# Allegro board B07_0918.brd
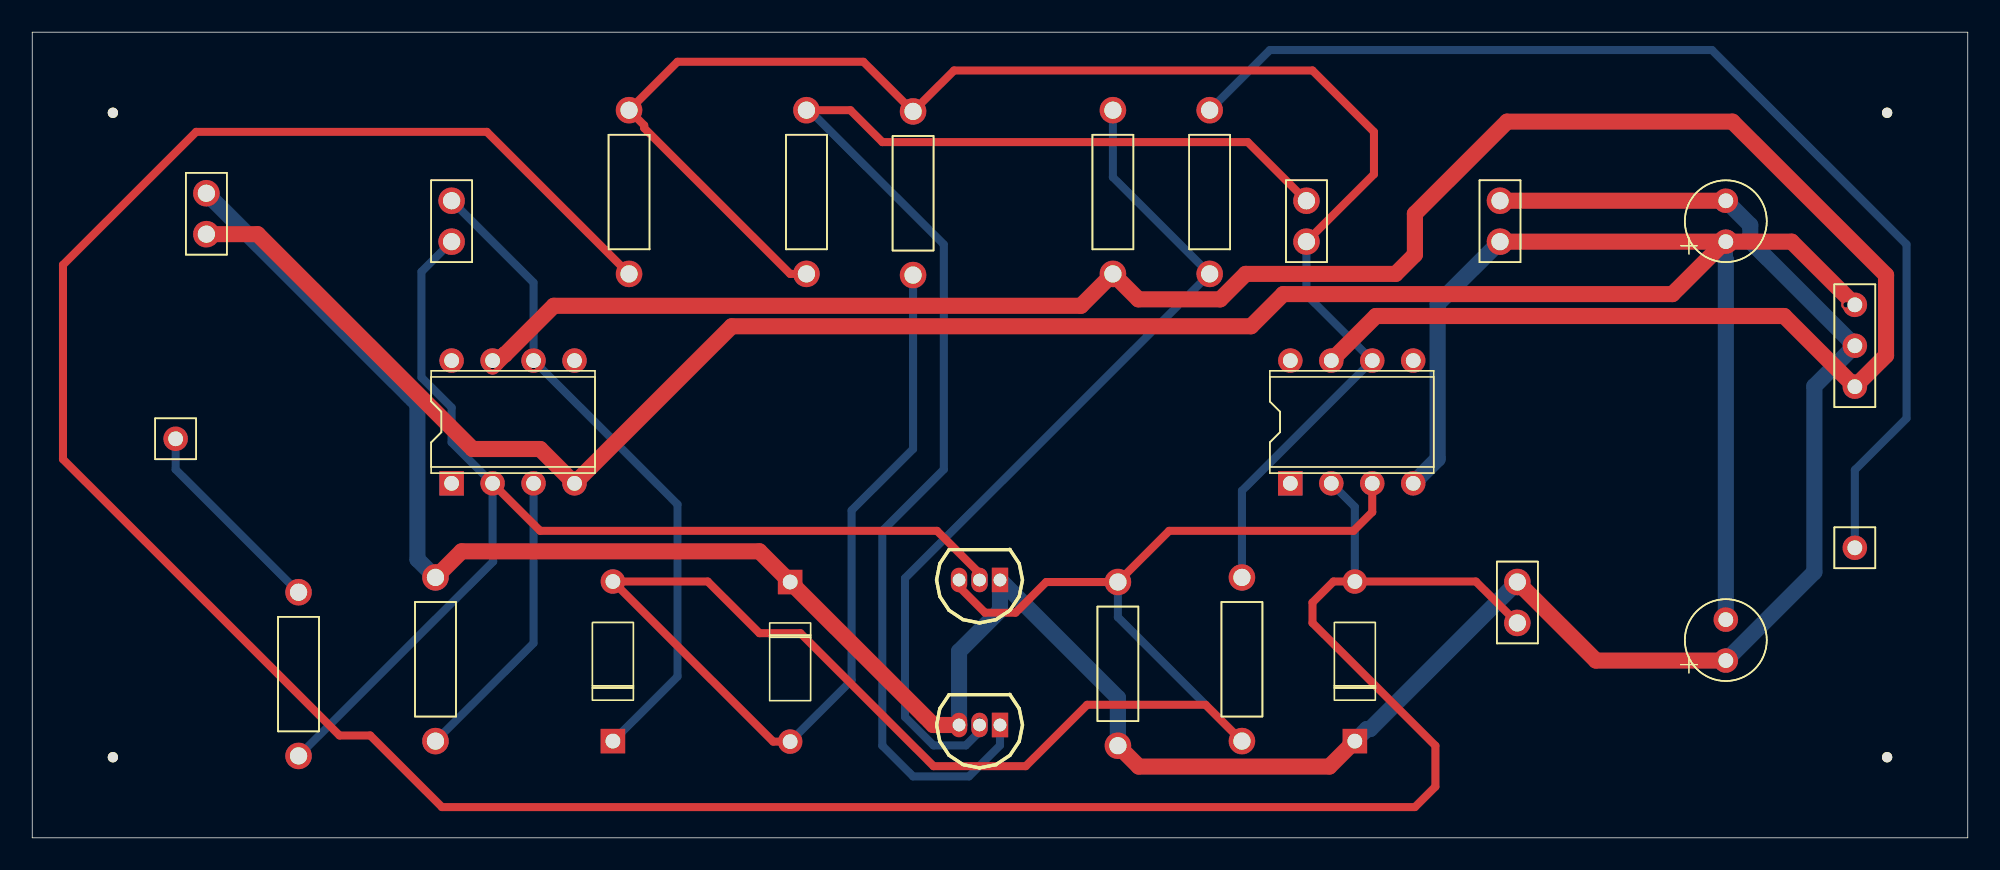
[diagram p0: board, top side]
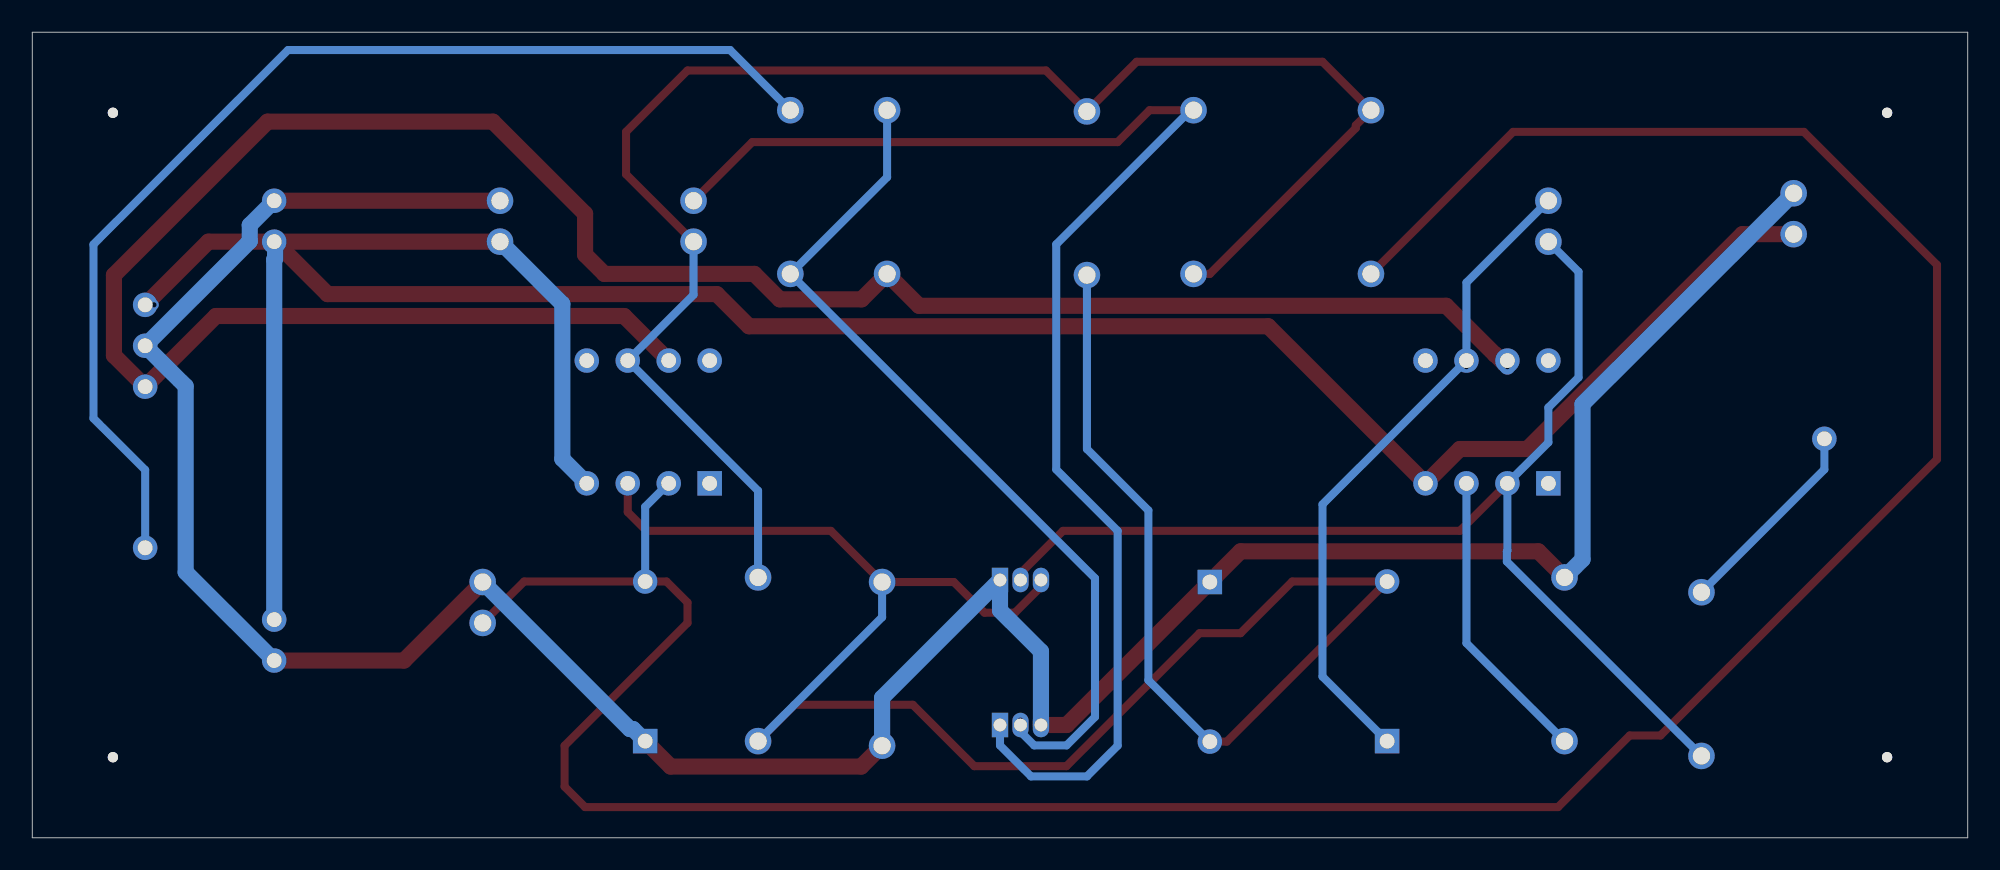
[diagram p1: board, bottom side, seen from below]

Outline 120 x 50 mm; copper layers: TOP, BOTTOM. Coordinates in mm from the lower left corner of the outline.
Outline path: 0,50 0,0 120,0 120,50 0,50

## Design rules (mm)
constraint set DEFAULT: min track width 0.5
nets with their own width: min track width 1; nets +12V -12V GND

## Placement (name value [footprint] x y rotation side)
C1  CAP NP  [CAPCK05]  10.79 37.47 0 top
C2  CAP NP  [CAPCK05]  26 37 0 top
C3  CAP NP  [CAPCK05]  91 37 0 top
C4  CAP NP  [CAPCK05]  92.08 13.34 0 top
C5  CAP NP  [CAPCK05]  79 37 0 top
C6  CAP POL  [CAP196]  105 11 0 top
C7  CAP POL  [CAP196]  105 37 0 top
D1  DIODE  [DO41]  82 6 0 top
D2  DIODE  [DO41]  36 6 0 top
D3  DIODE  [DO41]  46.99 15.88 180 top
J1  V1  [JUMPER1]  8.89 24.77 0 top
J2  CON3  [JUMPER3]  113 28 90 top
J3  CON1  [JUMPER1]  113 18 0 top
NOREF  -  []  0 31.78 0 top
NOREF#2  -  []  13.62 0 90 top
NOREF#3  -  [unnamed#2]  5 5 0 top
NOREF#4  -  [unnamed#2]  115 45 0 top
NOREF#5  -  [unnamed#2]  5 45 0 top
NOREF#6  -  [unnamed#2]  115 5 0 top
Q1  NPN BCE  [TO92]  60 16 180 top
Q2  NPN BCE  [TO92]  60 7 180 top
R1  RESISTOR  [RES400]  16.51 5.08 0 top
R2  RESISTOR  [RES400]  25 6 0 top
R3  RESISTOR  [RES400]  67.31 15.88 180 top
R4  RESISTOR  [RES400]  75 6 0 top
R5  RESISTOR  [RES400]  54.61 34.92 0 top
R6  RESISTOR  [RES400]  67 35 0 top
R7  RESISTOR  [RES400]  73 35 0 top
R8  RESISTOR  [RES400]  48 35 0 top
R9  RESISTOR  [RES400]  37 35 0 top
U1  LM741  [DIP8_3]  26 22 90 top
U2  LM741  [DIP8_3]  78 22 90 top

## Library data of the parts
C1-C5 = CAP NP: Tolerance: ***; User Part Number: ***
C6 C7 = CAP POL: Tolerance: ***; User Part Number: ***
D1-D3 = DIODE
J1 J3 = CON1: User Part Number: ***
J2 = CON3: User Part Number: ***
Q1 Q2 = NPN BCE
R1-R9 = R: Tolerance: ***; User Part Number: ***
U1 U2 = LM741_0: Tolerance: ***; User Part Number: ***

## Footprints (pads in the part's own frame, mm; a bottom-side part is the same pattern mirrored in y, then rotated)
CAP196
  round 1.524 hole 0.914: 1(0,0) 2(0,2.54)
CAPCK05
  round 1.651 hole 1.067: 1(0,0) 2(0,2.54)
DIP8_3
  rect 1.524x1.524 hole 0.914: 1(0,0)
  round 1.524 hole 0.914: 2(0,-2.54) 3(0,-5.08) 4(0,-7.62) 5(7.62,-7.62) 6(7.62,-5.08) 7(7.62,-2.54) 8(7.62,0)
DO41
  rect 1.524x1.524 hole 0.914: 1(0,0)
  round 1.524 hole 0.914: 2(0,9.906)
JUMPER1
  round 1.524 hole 0.914: 1(0,0)
JUMPER3
  round 1.524 hole 0.914: 1(0,0) 2(2.54,0) 3(5.08,0)
RES400
  round 1.651 hole 1.067: 1(0,0) 2(0,10.16)
TO92
  rect 1.016x1.524 hole 0.787: 1(0,0)
  oval 1.016x1.524 hole 0.787: 2(1.27,0) 3(2.54,0)
unnamed#2
  round 0.635 hole 3.175 unplated: (0,0)

## Nets
+12V: J2.1 R6.1 U1.7 U2.7
-12V: C1.1 C3.1 C6.2 C7.1 J2.3 U1.4(V-) U2.4(V-)
GND: C1.2 C3.2 C4.2 C6.1 C7.2 D1.1(K) D3.1(K) J2.2 Q1.1 Q2.3(E) R2.2 R3.2
N01138: J1.1 R1.2
N01170: C2.1 Q1.2 R1.1 U1.2
N01174: R2.1 U1.3
N01239: D2.2 D3.2 Q1.3(E) R3.1 R4.1 R5.1 U2.3
N01277: C5.1 R4.2 R5.2 R8.1 R9.2 U2.6
N01395: C2.2 D2.1(K) U1.6
N01445: C4.1 D1.2 R9.1 U2.2
N01516: C5.2 Q2.1 R8.2
N01704: Q2.2 R6.2 R7.1
N01755: J3.1 R7.2

Pads without a net: U1 1 5 8; U2 1 5 8

## Via types
v1: diameter 0.61, hole 0.33, TOP to BOTTOM, 25 vias

## Routing (per net, layer and track width the routed paths; a pad name or vN(x,y) marks a point on that pad's centre or on a via; arc(x,y) is an arc through that point)
+12V: length 143
  TOP w1: v1(28.54,29.25) 29.29,29.99 29.31,29.99 32.34,33.02 65.02,33.02 R6.1 68.58,33.42 73.65,33.42 75.23,35 84.53,35 85.72,36.2 85.72,38.73 91.44,44.45 105.41,44.45 114.94,34.92 114.94,29.93 J2.1 108.61,32.38 83.31,32.38 U2.7
  BOTTOM w1: U1.7 v1(28.54,29.25)
  vias: v1(80.54,29.74)
-12V: length 171.2
  TOP w1: C3.1 v1(104.94,37) ; v1(104.94,37) v1(105,37) 109.08,37 J2.3 ; v1(104.94,37) 101.69,33.75 77.56,33.75 75.56,31.75 43.37,31.75 U1.4 31.49,24.13 27.3,24.13 13.97,37.47 C1.1
  BOTTOM w1: U2.4 87.14,23.52 87.14,33.14 C3.1 ; C6.2 105,35.89 104.94,35.94 v1(104.94,37) v1(105,37)
  vias: v1(112.45,33.08)
GND: length 185.3
  TOP w1: C3.2 C7.2 ; R3.2 68.6,4.42 80.42,4.42 v1(82,6) v1(82,5.8) ; v1(57.47,7) v1(57.46,7) 55.87,7 D3.1 45.09,17.78 26.62,17.78 R2.2 ; v1(104.98,11) 96.95,11 C4.2
  BOTTOM w1: C4.2 82.95,6.75 82.75,6.75 v1(82,6) v1(82,5.8) ; R2.2 23.88,17.28 23.88,26.92 C1.2 ; R3.2 67.31,8.69 Q1.1 60,14.11 57.46,11.57 v1(57.46,7) ; v1(104.98,11) C6.1 110.49,16.49 110.49,28.03 J2.2 106.52,37.02 106.52,38.02 C7.2
N01138: length 12.7
  BOTTOM w0.5: R1.2 8.89,22.86 J1.1
N01170: length 72.5
  TOP w0.5: U1.2 31.49,19.05 56.1,19.05 58.73,16.42 Q1.2
  BOTTOM w0.5: C2.1 24.13,35.13 24.13,28.58 26,26.71 26,24.54 U1.2 28.54,17.82 28.57,17.78 28.57,17.14 R1.1
N01174: length 18.5
  BOTTOM w0.5: R2.1 31.08,12.08 U1.3
N01239: length 137.5
  TOP w0.5: v1(36,15.91) 45.94,5.97 D3.2 ; R4.1 72.75,8.26 65.41,8.26 61.59,4.45 55.88,4.45 47.62,12.7 45.09,12.7 41.88,15.91 v1(36.16,15.91) ; Q1.3 57.46,15.58 59.07,13.97 60.96,13.97 62.87,15.88 R3.1 70.48,19.05 81.92,19.05 83.08,20.21 U2.3
  BOTTOM w0.5: R4.1 67.31,13.69 R3.1 ; R5.1 54.61,24.13 50.8,20.32 50.8,9.78 D3.2
N01277: length 101.2
  TOP w0.5: C5.1 83.19,41.19 83.19,43.81 79.38,47.62 57.15,47.62 R5.2 51.53,48.16 40.01,48.16 v1(37,45.16) 37.94,44.22 37.94,44.05 46.99,35 v1(48,35)
  BOTTOM w0.5: v1(37,45.16) v1(36.91,45.16) ; C5.1 79,33.7 U2.6 75,21.54 R4.2
  vias: v1(48,35.19) v1(75.22,16.16)
N01395: length 41
  BOTTOM w0.5: D2.1 40.01,10.01 40.01,20.7 U1.6 31.08,34.46 C2.2
  vias: v1(31.08,29.25) v1(36,5.91)
N01445: length 184.5
  TOP w0.5: R9.1 28.18,43.81 10.16,43.81 1.91,35.56 1.91,23.5 19.05,6.35 20.95,6.35 25.4,1.91 85.72,1.91 87,3.17 87,5.71 79.38,13.34 79.38,14.61 80.68,15.91 v1(81.95,15.91) v1(82,15.91) 89.5,15.91 C4.1
  BOTTOM w0.5: U2.2 82,20.54 v1(82,15.91) v1(81.95,15.91) ; R9.1 v1(36.91,35)
N01516: length 88.4
  TOP w0.5: v1(48,45.16) 50.73,45.16 52.7,43.18 75.36,43.18 C5.2
  BOTTOM w0.5: Q2.1 60,5.73 58.08,3.81 54.61,3.81 52.7,5.71 52.7,19.05 56.52,22.86 56.52,36.83 48.19,45.16 v1(48,45.16) v1(47.7,45.16)
N01704: length 54.1
  BOTTOM w0.5: Q2.2 58.73,6.58 57.88,5.73 55.88,5.73 54.11,7.5 54.11,16.11 R7.1 67,41 R6.2
  vias: v1(58.73,7.29)
N01755: length 69.9
  BOTTOM w0.5: J3.1 113,22.83 116.2,26.04 116.2,36.83 104.14,48.9 76.73,48.9 R7.2

## Text on the board
COMPVAL_TYPE_TOP: FIGURE | FINISHED_SIZE | 0.3302 | 0.7874 | 0.9144 | 1.0668 | 3.175 | DRILL CHART: TOP to BOTTOM | ALL UNITS ARE IN MILLIMETERS | PLATED | NON-PLATED | QTY | 51 | 6 | 31 | 28 | 4
